# Altium PCB S67_01_0333.PcbDoc
Units mil, origin at the board's own origin, x right, y up, seen from the top; angles counter-clockwise.
Board outline 6000 x 4000 mil, 2 copper layers (Top Layer, Bottom Layer); 25 components, 28 nets, 118 pads, 4 vias.
Unrouted connection lines stored in the file: 1.
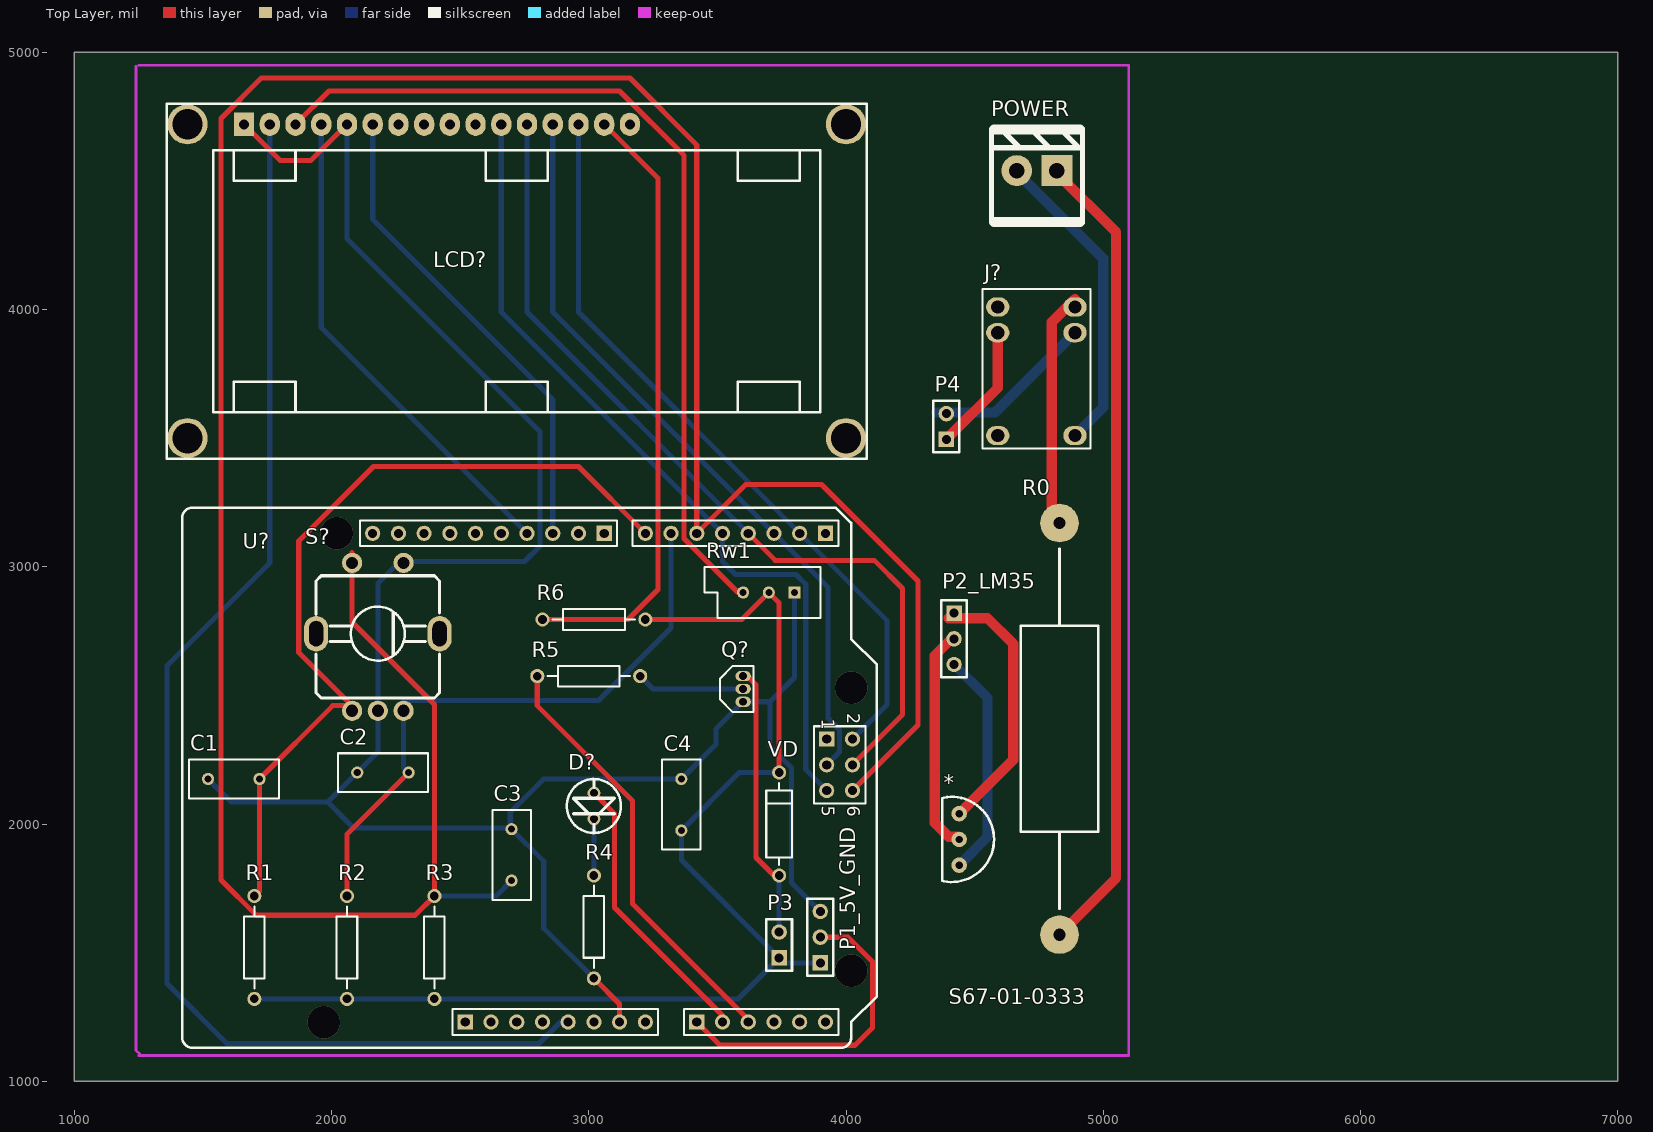
[diagram p0: Top Layer view]
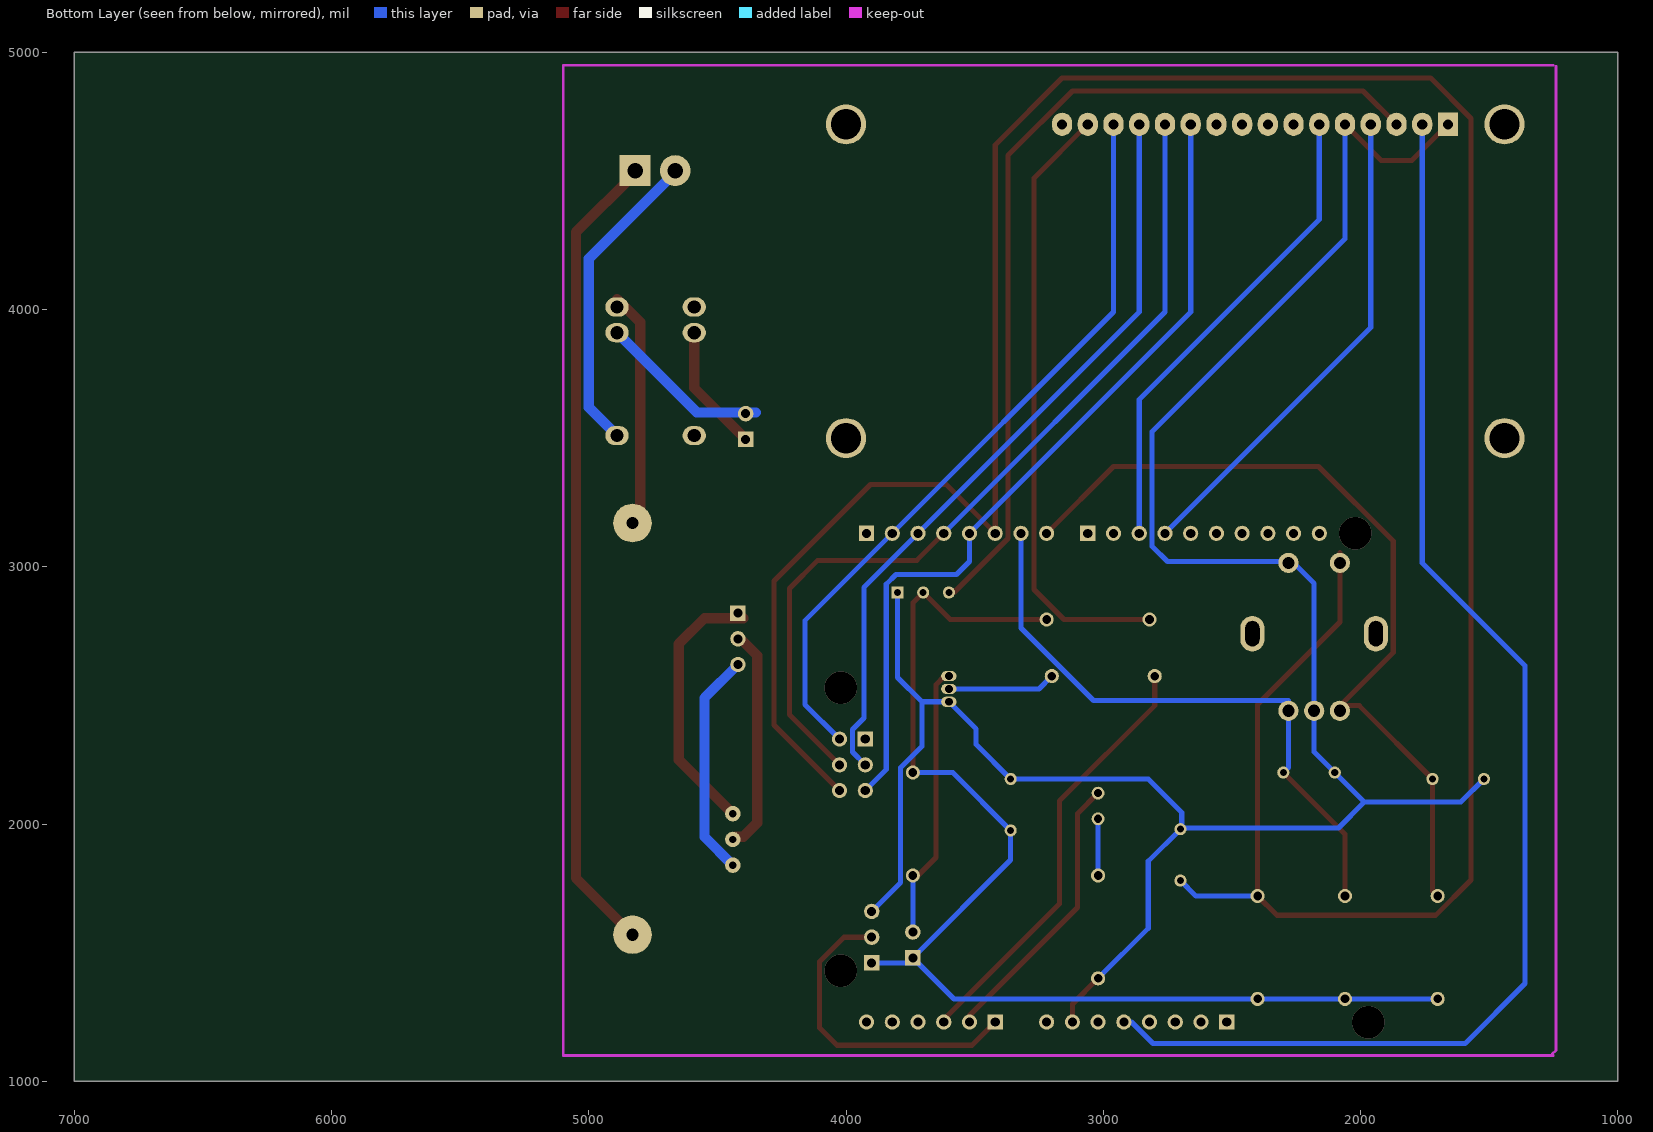
[diagram p1: Bottom Layer view, seen from below]

## Layer stack, top to bottom
Top Layer: signal copper 1.4
Dielectric: dielectric 12.6, FR-4, Dk 4.8
Bottom Layer: signal copper 1.4

## Board outline
1000,1000 7000,1000 7000,5000 1000,5000

## Design rules (kind name [scope] priority, off if disabled: settings)
Clearance [All] p1: gap=10
PolygonConnect [All] p1: connectstyle=Relief reliefconductorwidth=10 reliefentries=4 polygonreliefangle="90 Angle"
RoutingVias [All] p1: holewidth=28 width=50 viastyle="Through Hole" minholewidth=28 minwidth=50 maxholewidth=28 maxwidth=50
SilkscreenOverComponentPads [All] p1: minsilkscreentomaskgap=10
SolderMaskExpansion [All] p1: expansion=4
TestPointUsage [All] p1: valid=0 allowmultiple=FALSE
Testpoint [All] p1: side=15 testpointundercomponent=TRUE minsize=40 maxsize=100 preferedsize=60 minholesize=0 maxholesize=40 preferedholesize=32 testpointgrid=1 style=1023 order=0123456789
Width [All] p1: maxlimit=50 minlimit=10 preferedwidth=10
23 further rules are at their usual default settings.

## Components (designator, comment, footprint, x,y, rotation, side; value= is the part's Value field where it differs from the comment)
* "LM35" LM35 4440,2040 r0 top
C1 "Cap" RAD-0.2 1620,2175 r180 top
C2 "Cap" RAD-0.2 2200,2200 r180 top
C3 "Cap" RAD-0.2 2700,1880 r270 top
C4 "Cap" RAD-0.2 3360,2075 r90 top
D? "LED0" LEDLXH-5 3020,2120 r0 top (schematic designator D1)
J? "HK4100F" HK4100F 4740,3810 r0 top
LCD? "LCD1602" LCD1602 1660,4720 r0 top (schematic designator LCD1)
P1_5V_GND "Header 3" SIP-3 3900,1460 r90 top
P2_LM35 "Header 3" SIP-3 4420,2820 r270 top
P3 "Header 2" SIP-2 3740,1480 r90 top
P4 "Header 2" SIP-2 4390,3495 r90 top
POWER "Header 2" "POWER PLUG2" 4820,4540 r0 top
Q? "NPN" TO-92B 3600,2575 r270 top (schematic designator Q1)
R0 "" AXIAL4cm 4830,1570 r90 top
R1 "Res2" AXIAL-0.4 1700,1520 r270 top
R2 "Res2" AXIAL-0.4 2060,1520 r270 top
R3 "Res2" AXIAL-0.4 2400,1520 r90 top
R4 "Res2" AXIAL-0.4 3020,1600 r90 top
R5 "Res2" AXIAL-0.4 3000,2575 r180 top
R6 "Res2" AXIAL-0.4 3020,2795 r0 top
Rw1 "" VR5 3700,2900 r180 top
S? "SW-EC11" EC11 2180,2740 r0 top (schematic designator S1)
U? "Arduino" Arduino-UNO 3060,2180 r0 top (schematic designator U1)
VD "Diode 1N914" DIODE-0.4 3740,2000 r90 top

## Footprints (in the part's own frame and the unit in brackets; to place one, negate y for a bottom-side part, rotate by r counter-clockwise, add the part's x,y. Pads: shape width x height; smd on the part's side, far side on the other; paste and mask are expansions set on the pad)
Arduino-UNO [mm] "Arduino板"
  rect 1.5x1.5 hole 0.9: 1(21.844,24.13) 1(21.971,3.81) 9(0,24.13) 19(-13.716,-24.13) 27(9.144,-24.13)
  round 1.5 hole 0.9: 2(19.304,24.13) 2(24.511,3.81) 3(16.764,24.13) 3(21.971,1.27) 4(14.224,24.13) 4(24.511,1.27) 5(11.684,24.13) 5(21.971,-1.27) 6(9.144,24.13) 6(24.511,-1.27) 7(6.604,24.13) 8(4.064,24.13) 10(-2.54,24.13) 11(-5.08,24.13) 12(-7.62,24.13) 13(-10.16,24.13) 14(-12.7,24.13) 15(-15.24,24.13) 16(-17.78,24.13) 17(-20.32,24.13) 18(-22.86,24.13) 20(-11.176,-24.13) 21(-8.636,-24.13) 22(-6.096,-24.13) 23(-3.556,-24.13) 24(-1.016,-24.13) 25(1.524,-24.13) 26(4.064,-24.13) 28(11.684,-24.13) 29(14.224,-24.13) 30(16.764,-24.13) 31(19.304,-24.13) 32(21.844,-24.13)
  silkscreen extent -41.66,-26.67 26.92,26.67
AXIAL4cm [mil] "加热大电阻"
  round 150 hole 48: 1(0,0) 2(1600,0)
  silkscreen extent 100,-150 1500,150
AXIAL-0.4 [mm] "Resistor; 2 Leads"
  round 1.4 hole 0.85: 1(-5.08,0) 2(5.08,0)
  silkscreen extent -4.06,-1.02 4.06,1.02
DIODE-0.4 [mm] "Tunnel Diode - Dependent Source Model; 2 Leads"
  round 1.4 hole 0.85: 1(-5.08,0) 2(5.08,0)
  silkscreen extent -4.06,-1.27 4.06,1.27
EC11 [mm] "旋转编码器"
  round 2 hole 1.2: 1(-2.54,-7.62) 2(0,-7.62) 3(2.54,-7.62) 4(2.54,6.985) 5(-2.54,6.985)
  oval 2.4x3.5 hole 1.4 slot 2.5 at 90 deg: 6(-6.096,0) 7(6.096,0)
  silkscreen extent -6.1,-6.35 6.1,5.71
HK4100F [mm] "继电器(单刀)"
  oval 2.3x1.9 hole 1.3: 1(-3.81,5.08) 2(-3.81,2.54) 3(-3.81,-7.62) 4(3.81,-7.62) 5(3.81,2.54) 6(3.81,5.08)
  silkscreen extent -5.33,-8.89 5.33,6.86
LCD1602 [mm] "1602液晶屏"
  round 3.962 hole 3: 0(-5.588,-30.988) 0(-5.588,0) 0(59.436,-30.988) 0(59.436,0)
  rect 2x2.3 hole 1: 1(0,0)
  oval 2x2.3 hole 1: 2(2.54,0) 3(5.08,0) 4(7.62,0) 5(10.16,0) 6(12.7,0) 7(15.24,0) 8(17.78,0) 9(20.32,0) 10(22.86,0) 11(25.4,0) 12(27.94,0) 13(30.48,0) 14(33.02,0) 15(35.56,0) 16(38.1,0)
  silkscreen extent -7.62,-33.02 61.47,2.03
LEDLXH-5 [mil]
  round 50 hole 32: 1(0,0) 2(0,-100)
  silkscreen extent -105,-155 105,55
LM35 [mil]
  round 60 hole 28: 1(0,0) 2(0,-100) 3(0,-200)
  silkscreen extent -65,-266 136,66
"POWER PLUG2" [mil] "单电源插座"
  rect 120x120 hole 60: 1(0,0)
  round 120 hole 60: 2(-156,0)
  silkscreen extent -255,-204 100,164
RAD-0.2 [mm] "Jumper Wire; 2 Leads"
  round 1.2 hole 0.7: 1(-2.54,0) 2(2.54,0)
  silkscreen extent -4.44,-1.91 4.44,1.91
SIP-2 [mil]
  rect 60x60 hole 35: 1(0,0)
  round 60 hole 35: 2(100,0)
  silkscreen extent -50,-50 150,50
SIP-3 [mil]
  rect 60x60 hole 35: 1(0,0)
  round 60 hole 35: 2(100,0) 3(200,0)
  silkscreen extent -50,-50 250,50
TO-92B [mil]
  oval 40x60 hole 30: 1(0,0) 2(50,0) 3(100,0)
  silkscreen extent -40,-90 140,40
VR5 [mm] "Potentiometer; 3 Leads"
  rect 1.2x1.2 hole 0.7: 1(-2.54,0)
  round 1.2 hole 0.7: 2(0,0) 3(2.54,0)
  silkscreen extent -5.08,-2.54 6.35,2.54

## Part data
*: "LM35温度传感器"
C1 C2 C3 C4: "Capacitor"
D?: "Typical INFRARED GaAs LED"
J?: "单刀双掷继电器"
LCD?: "液晶屏"
P1_5V_GND P2_LM35: "Header, 3-Pin"
P3 P4 POWER: "Header, 2-Pin"
Q?: "NPN Bipolar Transistor"
R0: library part Res2, "Resistor"
R1 R2 R3 R4 R5 R6: "Resistor"
Rw1: library part RPot, "Potentiometer"
S?: "旋转编码开关"
U?: library part Arduino-UNO
VD: "High Conductance Fast Diode"

## Via types
v1: diameter 125.98, hole 125.98, Top Layer to Bottom Layer, 4 vias

## Nets (pads, with @x,y where several pads share a name; then routed paths per layer and width w, separated by ;. In a path a pad name is that pad's centre, name@x,y a point inside that pad or via, vN(x,y) a via of type N, cw(c..) or ccw(c..) an arc to the next point about the centre after c; other vN are vias at no path point)
5V: LCD?.2 U?.23 | length 5196.6
  Bottom Layer w20: LCD?.2 1760,3015 1360,2615 1360,1380 1592.99,1147.01 2807.05,1147.01 2890.04,1230 U?.23
+5: C4.1 P1_5V_GND.1 P3.1 R1.2 R2.2 R3.1 R6.2 Rw1.2 VD.2 | length 4623.7
  Top Layer w20: R6.2 3595,2795 Rw1.2 3740,2860 VD.2
  Bottom Layer w20: R1.2 R2.2 R3.1 3580,1320 3720,1460 P1_5V_GND.1 ; P3.1 3360,1860 C4.1 3585,2200 VD.2
A0: P1_5V_GND.2 U?.27 | length 1247.4
  Top Layer w20: U?.27 3510,1140 4035,1140 4102.99,1207.99 4102.99,1464.38 4007.37,1560 P1_5V_GND.2
A1: D?.1 U?.28 | length 1097.1
  Top Layer w20: D?.1 3100,2040 3100,1675 3520,1255 U?.28
A2: R5.2 U?.29 | length 1684.7
  Top Layer w20: R5.2 2800,2460 3170,2090 3170,1690 3620,1240 U?.29
CLR: J?.5 P4.2 | length 668.4
  Bottom Layer w40: 4350,3600 4580,3600 J?.5
D2: LCD?.14 U?.2 | length 2943
  Bottom Layer w20: LCD?.14 2960,3990 3820,3130 4160,2790 4160,2465 U?.2@4025,2330
D3: LCD?.13 U?.3 | length 2972.2
  Bottom Layer w20: LCD?.13 2860,3990 3720,3130 3930,2920 3930,2412.34 3974.53,2367.81 3974.53,2279.53 U?.3@3925,2230
D4: LCD?.12 U?.4 | length 3401.1
  Top Layer w20: U?.4@3620,3130 3725,3025 4110,3025 4220,2915 4220,2425 U?.4@4025,2230
  Bottom Layer w20: LCD?.12 2760,3990 U?.4@3620,3130
D5: LCD?.11 U?.5 | length 3251.9
  Bottom Layer w20: LCD?.11 2660,3990 3520,3130 3520,3020 3570,2970 3805.53,2970 3843.62,2931.91 3843.62,2211.38 U?.5@3925,2130
D6: C3.2 R3.2 S?.5 U?.6 | length 11218.1
  Top Layer w20: 2080,3055 S?.5 2080,2785 2400,2465 R3.2 2325,1645 1707.74,1645 1570,1782.74 1570,4742.93 1727.07,4900 3160,4900 3420,4640 3420,3130 3610,3320 3905,3320 4280,2945 4280,2385 U?.6@4025,2130
  Bottom Layer w20: R3.2 2640,1720 C3.2
D7: C2.1 R2.1 S?.3 U?.7 | length 2392.4
  Top Layer w20: R2.1 2060,1960 C2.1
  Bottom Layer w20: C2.1 2280,2220 2280,2480 3037.74,2480 3320,2762.26 U?.7
D8: C1.1 R1.1 S?.1 U?.8 | length 3242.3
  Top Layer w20: R1.1 1720,1740 C1.1 2005,2460 2080,2460 1872.76,2667.24 1872.76,3100.12 2162.63,3390 2960,3390 U?.8
D11: LCD?.6 U?.11 | length 1879.9
  Bottom Layer w20: LCD?.6 2160,4350 2860,3650 U?.11
D12: LCD?.4 U?.12 | length 1921.4
  Bottom Layer w20: LCD?.4 1960,3930 U?.12
GND: C1.2 C2.2 C3.1 C4.2 LCD?.1 LCD?.5 LCD?.16 P1_5V_GND.3 Q?.3 R4.1 Rw1.1 S?.2 S?.4 U?.25 | length 8966.8
  Top Layer w20: LCD?.1 1800,4580 1920,4580 LCD?.5 ; R4.1 3120,1300 U?.25
  Bottom Layer w20: C1.2 1610,2085 1985,2085 ; LCD?.5 2060,4275 2810,3525 2810,3080 2750,3020 S?.4@2265,3020 ; 2180,2480 S?.2@2180,2460 ; S?.4@2280,3035 S?.4@2265,3020 ; R4.1 2825,1595 2825,1855 C3.1 C3.1@2695,1985 ; Rw1.1 3800,2570 3705,2475 ; P1_5V_GND.3@3900,1670 P1_5V_GND.3 3787.56,1772.44 3787.56,2219.7 3705,2302.26 3705,2475 ; 1985,2085 2085,1985 C3.1@2695,1985 ; 1985,2085 C2.2 2180,2280 S?.2@2180,2460 ; S?.2@2180,2460 2180,2935 S?.4@2265,3020 ; C3.1@2695,1985 2695,2045 2825,2175 C4.2 3495,2310 3495,2370 Q?.3 3705,2475
Net*_1: *.1 P2_LM35.1 | length 1066.7
  Top Layer w40: P2_LM35.1 4400,2800 4550,2800 4650,2700 4650,2250 *.1
Net*_2: *.2 P2_LM35.2 | length 849.7
  Top Layer w40: P2_LM35.2@4410,2720 4345,2655 4345,2005 4400,1950 *.2@4430,1950
Net*_3: *.3 P2_LM35.3 | length 879.4
  Bottom Layer w40: P2_LM35.3 4550,2490 4550,1950 *.3
NetD?_2: D?.2 R4.2 | length 220
  Bottom Layer w20: R4.2 D?.2
NetJ?_2: J?.2 P4.1 | length 497.8
  Top Layer w40: P4.1 4590,3695 J?.2
NetJ?_4: J?.4 POWER.2 | length 1214.7
  Bottom Layer w40: POWER.2 4664,4533.57 5000,4197.57 5000,3620 J?.4
NetJ?_6: J?.6 R0.2 | length 932.3
  Top Layer w40: R0.2@4800,3145 4800,3950 J?.6@4890,4040
NetLCD?_15: LCD?.15 R6.1 | length 2392.9
  Top Layer w20: R6.1 3152.74,2795 3269.53,2911.79 3269.53,4510.47 LCD?.15
NetP3_2: P3.2 Q?.1 VD.1 | length 1074.4
  Top Layer w20: Q?.1 3616.57,2575 3650,2541.57 3650,1870 3720,1800 VD.1
  Bottom Layer w20: P3.2 VD.1
NetPOWER_1: POWER.1 R0.1 | length 3156.4
  Top Layer w40: POWER.1 4820,4530 5050,4300 5050,1790 R0.1
NetQ?_2: Q?.2 R5.1 | length 420.7
  Bottom Layer w20: R5.1 3250,2525 Q?.2
VO: LCD?.3 Rw1.3 | length 3474.3
  Top Layer w20: LCD?.3 1990,4850 3119.87,4850 3370.47,4599.39 3370.47,3109.49 3579.96,2900 Rw1.3
pads on no net: J?.1 J?.3 LCD?.0 LCD?.7 LCD?.8 LCD?.9 LCD?.10 S?.6 S?.7 U?.1 U?.9 U?.10 U?.13 U?.14 U?.15 U?.16 U?.17 U?.18 U?.19 U?.20 U?.21 U?.22 U?.24 U?.26 U?.30 U?.31 U?.32
copper on no net:
  other v1: 1970,1230 4020,1430 4020,2530 2020,3130

## Keep-outs
Keep-Out Layer:
  lines w10: 1240,4945 1240,1120 1255,1105 ; 1250,1100 5100,1100 5100,4950 1250,4950

## Silkscreen, mask and mechanical layers (free items; w line width, h text height)
Top Overlay:
  text "S67-01-0333" at 4400,1300 h60

## Text inside footprints (layer, text, board x,y; h text height)
U?: Top Overlay "1" at 3905,2410 h50 r270; Top Overlay "2" at 4005,2430 h50 r270; Top Overlay "5" at 3905,2070 h50 r270; Top Overlay "6" at 4005,2070 h50 r270